# Altium PCB _1PCB (1).PcbDoc
Units mil, origin at the board's own origin, x right, y up, seen from the top; angles counter-clockwise.
Board outline 3580 x 1380 mil, 2 copper layers (Top Layer, Bottom Layer); 31 components, 20 nets, 79 pads, 0 vias.
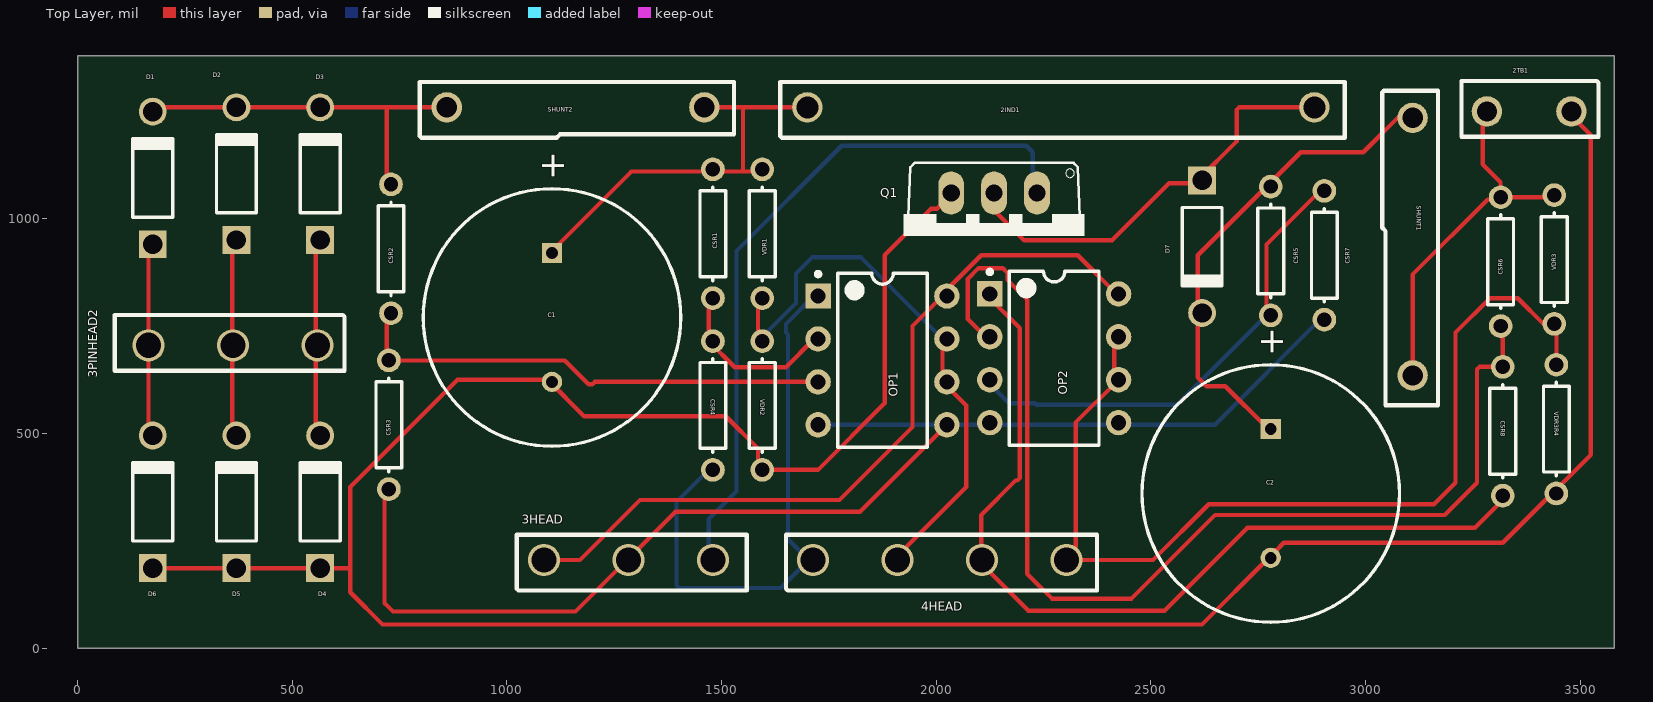
[diagram p0: Top Layer view]
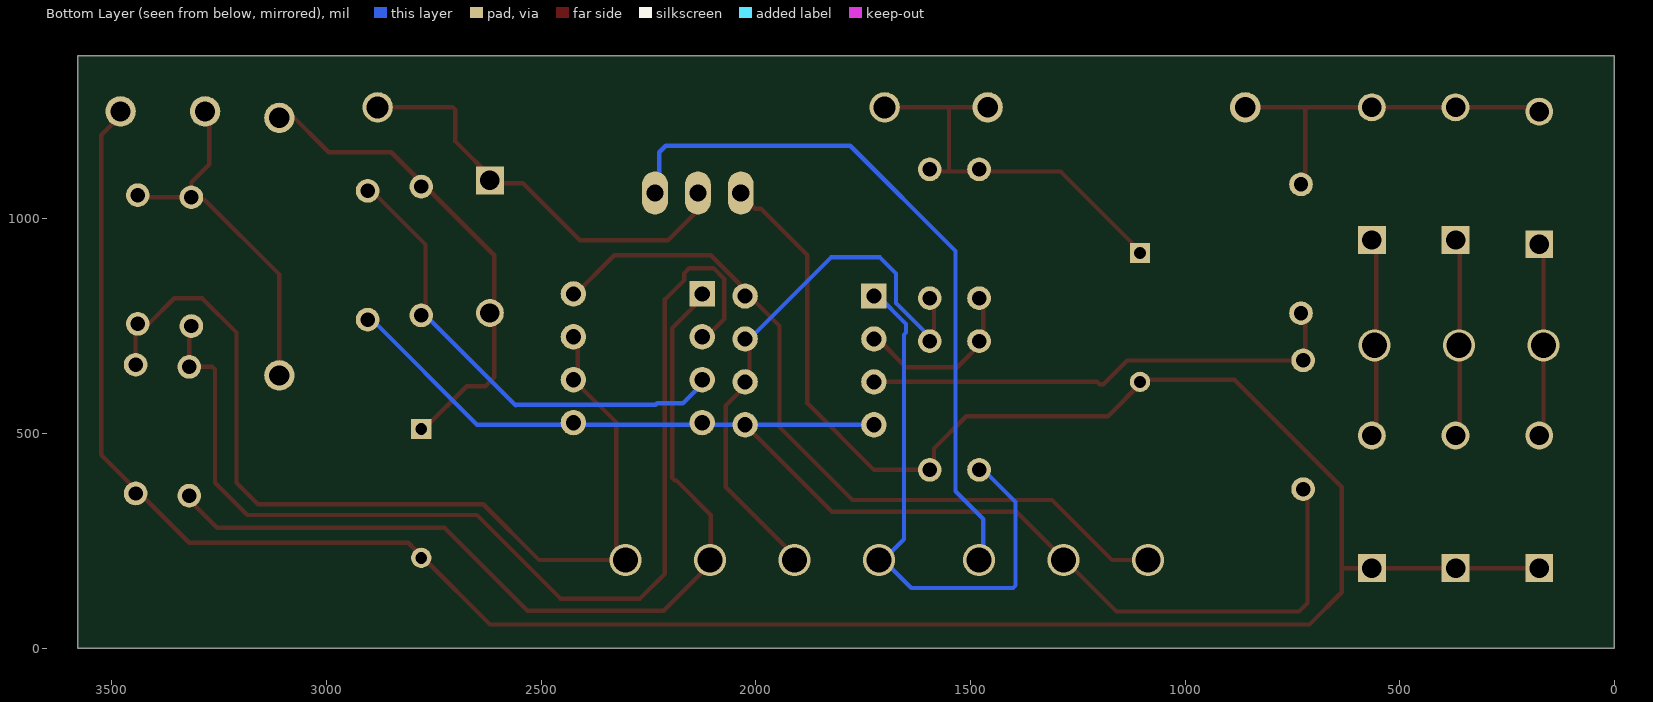
[diagram p1: Bottom Layer view, seen from below]

## Layer stack, top to bottom
Top Solder: solder mask 0.4, Solder Resist, Dk 3.5
Top Layer: signal copper 1.4
Dielectric 1: dielectric 12.6, FR-4, Dk 4.8
Bottom Layer: signal copper 1.4
Bottom Solder: solder mask 0.4, Solder Resist, Dk 3.5

## Board outline
0,0 3580,0 3580,1380 0,1380

## Design rules (kind name [scope] priority, off if disabled: settings)
AssemblyTestPointUsage [All] p1: valid=2
BoardOutlineClearance [All] p1: gap=10 ignorepadtopadclearanceinfootprint=FALSE
Clearance [All] p1: gap=7 ignorepadtopadclearanceinfootprint=FALSE except(0: Arc-Hole Track-Hole SMDPad-Hole THPad-Hole Via-Hole Fill-Hole Poly-Hole Region-Hole Text-Hole)
ComponentClearance [All] p1: gap=0 collisioncheckmode=3 verticalgap=0 showdistances=FALSE
FabricationTestPointUsage [All] p1: valid=2 allowmultiple=FALSE
FabricationTestPointUsage TestPointUsage [All] p2: valid=0 allowmultiple=FALSE
FabricationTestpoint Testpoint [All] p2: side=3 testpointundercomponent=TRUE minsize=40 maxsize=100 preferedsize=60 minholesize=0 maxholesize=40 preferedholesize=32 testpointgrid=1 allowsidetop=TRUE allowsidebottom=TRUE usegrid=TRUE gridtolerance=0.01
Height [All] p1: minheight=0 maxheight=2000 prefheight=500
HoleSize [All] p1: absolutevalues=TRUE maxlimit=250 minlimit=15 maxpercent=80.000 minpercent=20.000
MinimumAnnularRing MinimumAnnularRing_Vias [IsVia] p1: minimumring=5
MinimumAnnularRing [All] p2: minimumring=7
MinimumSolderMaskSliver [All] p1: minsoldermaskwidth=5
PolygonConnect [All] p1: connectstyle=Relief reliefconductorwidth=10 reliefentries=4 polygonreliefangle="90 Angle" airgapwidth=10
RoomDefinition _1PCB_Shematic [InComponentClass('_1PCB_Shematic')] p1: confinementstyle=ConfineIn formatcopy=TRUE lockcomponents=FALSE outline 28.15,5 3583.15,5 3583.15,1360 28.15,1360
RoutingVias [All] p1: holewidth=25 width=50 viastyle="Through Hole" minholewidth=15 minwidth=50 maxholewidth=25 maxwidth=50
SilkToSilkClearance [All] p1: silktosilkclearance=0
SilkToSolderMaskClearance [All] p1: minsilkscreentomaskgap=5 clearancetoexposedcopper=FALSE
SilkToSolderMaskClearance SilkToCopperClearance [All] p2: minsilkscreentomaskgap=10 clearancetoexposedcopper=TRUE
SilkToSolderMaskClearance SilkscreenOverComponentPads [IsPad] p3: minsilkscreentomaskgap=10 clearancetoexposedcopper=TRUE
SolderMaskExpansion [All] p1: expansion=4
Width [All] p1: maxlimit=500 minlimit=10 preferedwidth=10 minimp=50.000000 maximp=50.000000 favimp=50.000000
22 further rules are at their usual default settings.

## Classes and differential pairs
component class _1PCB_Shematic: 2IND1 2TB1 3PINHEAD2 C1 C2 CSR1 CSR2 CSR3 CSR4 D1 D2 D3 D4 D5 D6 D7 OP1 OP2 Q1 VDR1 VDR2 VDR3 VDR3R4

## Components (designator, comment, footprint, x,y, rotation, side; value= is the part's Value field where it differs from the comment)
2IND1 "291 INDUCTOR" "3 CM INDUCTOR" 1700,1259.53 r0 top
2TB1 "2PINTERMINAL" "2 PIN TERMINAL BLOCK" 3480,1250 r180 top
3HEAD "3 PIN HEADER" "3 PIN HEADER" 1086.3,205 r0 top
3PINHEAD2 "3 PIN HEADER" "3 PIN HEADER" 558.7,705 r180 top
4HEAD "4 PIN HEADER" "4 PIN HEADER" 1713.15,205 r0 top
C1 "Cap Pol1" RB7.6-15 1105,770 r90 top value=100pF
C2 "Cap Pol1" RB7.6-15 2779.53,360 r90 top value=100pF
CSR1 "CSR_R1" AXIAL-0.3 1480,965 r90 top value=1k
CSR2 "CSR_R1" AXIAL-0.3 730,930 r90 top value=1k
CSR3 "CSR_R2" AXIAL-0.3 725,520 r270 top value=100k
CSR4 "CSR_R2" AXIAL-0.3 1480,565 r270 top value=100k
CSR5 "CSR_R1" AXIAL-0.3 2779.53,925 r90 top value=1k
CSR6 "CSR_R1" AXIAL-0.3 3315,900 r90 top value=1k
CSR7 "CSR_R2" AXIAL-0.3 2904.53,915 r270 top value=100k
CSR8 "CSR_R2" AXIAL-0.3 3320,505 r270 top value=100k
D1 "1N5817-T" DIOD-DO-41-P-2 175,1095 r90 top
D2 "1N5817-T" DIOD-DO-41-P-2 370,1105 r90 top
D3 "1N5817-T" DIOD-DO-41-P-2 565,1105 r90 top
D4 "1N5817-T" DIOD-DO-41-P-2 565,340.47 r90 top
D5 "1N5817-T" DIOD-DO-41-P-2 370,340.47 r90 top
D6 "1N5817-T" DIOD-DO-41-P-2 175,340.47 r90 top
D7 "1N5817-T" DIOD-DO-41-P-2 2619.53,935 r270 top
OP1 "LM358AN" N08E 1875,670 r0 top
OP2 "LM358AN" N08E 2275,675 r0 top
Q1 "IRFZ48N" TO220BV_IRFZ48N(Primary) 2135,960 r180 top
SHUNT1 "SH. RESISTOR" SHUNT15.24 3110,1235 r270 top
SHUNT2 "SH. RESISTOR" SHUNT15.24 860,1259.53 r0 top
VDR1 "V_DIVA1" AXIAL-0.3 1595,965 r270 top value=200k
VDR2 "V_DIVB2" AXIAL-0.3 1595,565 r270 top value=100k
VDR3 "V_DIVA2" AXIAL-0.3 3440,905 r270 top value=200k
VDR3R4 "V_DIVB2" AXIAL-0.3 3445,510 r270 top value=100k

## Footprints (in the part's own frame and the unit in brackets; to place one, negate y for a bottom-side part, rotate by r counter-clockwise, add the part's x,y. Pads: shape width x height; smd on the part's side, far side on the other; paste and mask are expansions set on the pad)
"2 PIN TERMINAL BLOCK" [mm] "2 PIN TERMINAL BLOCK"
  round 1.8 hole 1.2: 1(0,0) 2(5,0)
  silkscreen extent -1.6,-1.8 6.5,1.5
"3 CM INDUCTOR" [mm] "3 CM INDUCTOR"
  round 1.8 hole 1.3: 1(0,0) 2(30,0)
  silkscreen extent -1.6,-1.8 31.8,1.5
"3 PIN HEADER" [mm] "3 PIN HEADER"
  round 1.9 hole 1.5: 1(0,0) 2(5,0) 3(10,0)
  silkscreen extent -1.6,-1.8 12,1.5
"4 PIN HEADER" [mm] "4 PIN HEADER"
  round 1.9 hole 1.5: 1(0,0) 2(5,0) 3(10,0) 4(15,0)
  silkscreen extent -1.6,-1.8 16.8,1.5
AXIAL-0.3 [mm] "Axial Device, Thru-Hole; 2 Leads; 0.3 in Pin Spacing"
  round 1.4 hole 0.85: 1(-3.81,0) 2(3.81,0)
  silkscreen extent -2.77,-0.76 2.77,0.76
DIOD-DO-41-P-2 [mm] "THD, 2-Leads, Body 4.635x2.36mm, Pin Spacing 7.85mm"
  rect 1.65x1.65 hole 1.15: 1(-3.925,0)
  round 1.65 hole 1.15: 2(3.925,0)
  silkscreen extent -2.32,-1.18 2.32,1.18, body extent -4.36,-1.18 4.36,1.18, height 2.35
N08E [mm] "DIP, 8-Pin, Row Spacing 7.62 mm, Pitch 2.54 mm"
  rect 1.5x1.5 hole 0.9: 1(-3.81,3.81)
  round 1.5 hole 0.9: 2(-3.81,1.27) 3(-3.81,-1.27) 4(-3.81,-3.81) 5(3.81,-3.81) 6(3.81,-1.27) 7(3.81,1.27) 8(3.81,3.81)
  silkscreen extent -3.93,-5.15 2.65,5.23, body extent -3.6,-5.15 3.6,5.15, height 5.33
RB7.6-15 [mm] "Polarized Capacitor (Radial); 2 Leads"
  rect 1.2x1.2 hole 0.7: 1(3.81,0)
  round 1.2 hole 0.7: 2(-3.81,0)
  silkscreen extent -7.62,-7.62 7.62,7.62
SHUNT15.24 [mm] "SHUNT RESISTER 15.24"
  round 1.8 hole 1.2: 1(0,0) 2(15.24,0)
  silkscreen extent -1.6,-1.8 17,1.5
TO220BV_IRFZ48N(Primary) [mil]
  oval 60x100 hole 40: D(0,-100) G(-100,-100) S(100,-100)
  silkscreen extent -210,-170 210,0

## Part data
2IND1: library part 2IND?
2TB1: library part 2TB?
3HEAD 3PINHEAD2: library part 3HEAD?
4HEAD: library part 4HEAD?
C1 C2: "Polarized Capacitor (Radial)", LatestRevisionDate=17-Jul-2002, LatestRevisionNote="Re-released for DXP Platform.", PackageDescription="Polarized Capacitor (Radial); 2 Leads", PackageReference=RB7.6-15, Published=8-Jun-2000, Publisher="Altium Limited"
CSR1 CSR2 CSR3 CSR4 CSR5 CSR6 CSR7 CSR8 VDR1 VDR2 VDR3 VDR3R4: library part Res1, "Resistor", LatestRevisionDate=17-Jul-2002, LatestRevisionNote="Re-released for DXP Platform.", PackageDescription="Axial Device, Thru-Hole; 2 Leads; 0.3 in Pin Spacing", PackageReference=AXIAL-0.3, Published=8-Jun-2000, Publisher="Altium Limited"
D1 D2 D3 D4 D5 D6 D7: library part CMP-2000-05521-1, "Schottky Barrier Rectifier, 1 A, 20 V, -65 to 125 degC, 2-Pin DO-41, RoHS, Tape and Reel", If - Forward Current=1A, Ifsm - Forward Surge Current=25A, Ir - Reverse Current=1000uA, Manufacturer=DiodesIncorporated, Maximum Operating Temperature=+125C, Minimum Operating Temperature=-65C, Operating Temperature Range=-65Cto+125C, Package / Case=DO-41, Package Description="2-Pin Through Hole Device, Body 4.635 x 2.36 mm, Pin Spacing 7.85 mm", Package Reference=DO-41-P-2, Vf - Forward Voltage=0.75Vat3A, Vrrm - Repetitive Reverse Voltage=20V, Brand=DiodesIncorporated, Configuration=Single, Datasheet URL=http://www.diodes.com/_files/datasheets/ds23001.pdf, Datasheet Version="Rev. 8-2, 05/2009", Factory Pack Quantity=5000, Height=2.72mm, Length=5.21mm, Manufacturer URL=http://www.diodes.com/, Mounting Style=ThroughHole, Mounting Technology=ThroughHole, Packaging=Reel, Product=SchottkyRectifiers, Product Category=SchottkyDiodes&Rectifiers, RoHS=True, Series=1N58, Technology=Si, Termination Style=ThroughHole, Type=SchottkyDiode, Unit Weight=0.010582oz, Width=2.72mm
OP1 OP2: library part CMP-0055-00164-2, "Low Power Dual Operational Amplifier, 8-pin MDIP", Manufacturer="National Semiconductor", PackageTopMarking=NSUZXYTTE#*LM*358AN, PowerWise=N, Code_JEDEC=MS-001-BA, ComponentLink1Description="LM358 Datasheet", ComponentLink1URL=http://www.national.com/ds/LM/LM358.pdf, ComponentLink2Description="LM358 Web Page", ComponentLink2URL=http://www.national.com/pf/LM/LM358.html, ComponentLink3Description="N08E Package Page", ComponentLink3URL=http://www.national.com/packaging/folders/n08e.html, CompType=Amplifiers, DatasheetVersion=Oct-2005, PackageDescription="MDIP, .365 x .250 x .130in, 8 Lead, .100in Pitch", PackageReference=N08E, PackageVersion="revG, May-2006", PinCount=8, RevisionNote="Component URLs added", RoHS=N
Q1: "55V Single N-Channel HEXFET Power MOSFET in a TO-220AB package", Package=None, Availability=Unavailable, MF="International Rectifier", MP=IRFZ48N, Price=None, SnapEDA_Link=https://www.snapeda.com/parts/IRFZ48N/International%20Rectifier/view-part/?ref=snap
SHUNT1 SHUNT2: library part SHUNTR?

## Nets (pads, with @x,y where several pads share a name; then routed paths per layer and width w, separated by ;. In a path a pad name is that pad's centre, name@x,y a point inside that pad or via, vN(x,y) a via of type N, cw(c..) or ccw(c..) an arc to the next point about the centre after c; other vN are vias at no path point)
"ARD 5V": 3HEAD.1 OP1.8 OP2.8 | length 1825.7
  Top Layer w10: 3HEAD.1@1076.3,205 1170,205 1310,345 1775,345 1945,515 1945,750 OP1.8@2015,820 ; OP1.8@2015,830 2019.93,830 2104.93,915 2330,915 OP2.8@2425,820 ; OP2.8@2420,835 OP2.8@2430,835
"ARD GND": 3HEAD.2 CSR3.2 CSR7.2 OP1.4 OP1.5 OP2.4 OP2.5 | length 3043.3
  Top Layer w10: CSR3.2@715,370 715,104.53 734.53,85 1160,85 1392.5,317.5 1822.5,317.5 2005,500 OP1.5@2005,520
  Bottom Layer w10: 3HEAD.2@1273.15,205 3HEAD.2@1280,205 ; OP1.4@1715,520 2125,520 2415,520 2649.53,520 CSR7.2@2894.53,765
"CURRENT 1": 4HEAD.1 CSR4.2 OP1.1 | length 1301.6
  Bottom Layer w10: CSR4.2@1470,415 1395,340 1395,145.86 1400.86,140 1638.15,140 1703.15,205 1655,253.15 1655,730 1650,735 1650,755 OP1.1@1715,820
"CURRENT 2": 4HEAD.3 CSR8.2 OP2.1 | length 2085.1
  Top Layer w10: OP2.1@2115,825 2195,745 2195,395.86 2189.14,390 2185,390 2105,310 2105,213.15 2096.85,205 2214.85,87 2532,87 2725,280 3255,280 3320,345 CSR8.2
Net2IND1_1: 2IND1.1 C1.1 CSR1.2 SHUNT2.2 VDR1.1 | length 948.2
  Top Layer w10: C1.1@1105,925 1290,1110 1470,1110 1550,1110 ; SHUNT2.2@1450,1259.53 1550,1259.53 ; VDR1.1@1585,1115 1580,1110 1550,1110 ; 2IND1.1@1690,1259.53 1550,1259.53 ; 1550,1110 1550,1259.53
Net2IND1_2: 2IND1.2 D7.1 Q1.D | length 980.6
  Top Layer w10: Q1.D@2125,1060 2125,1030 2205,950 2410,950 2542.5,1082.5 2602.5,1082.5 2609.53,1089.53 2700,1180 2700,1253.67 2705.86,1259.53 2IND1.2@2871.1,1259.53
Net2TB1_1: 2TB1.1 C1.2 C2.2 D4.1 D5.1 D6.1 Q1.S VDR2.2 VDR3R4.2 | length 6695.3
  Top Layer w10: D6.1@165,185.94 D6.1 D5.1 D4.1 629.14,185.94 ; Q1.S@2025,1060 2025,1046.28 2001.9,1023.18 1988.18,1023.18 1880,915 1880,570 1725,415 VDR2.2 1585,415 1585,465 1510,540 1180,540 1095,625 885,625 635,375 635,130 710,55 2619.53,55 C2.2@2772.64,208.11 ; C2.2@2772.87,227.87 2792.64,227.87 2809.76,245 3320,245 3525,450 3525,1195 2TB1.1@3470,1250
Net2TB1_2: 2TB1.2 CSR6.2 SHUNT1.2 VDR3.1 | length 849
  Top Layer w10: SHUNT1.2@3110,655 3110,870 3284.91,1044.91 3314.91,1044.91 CSR6.2@3320,1050 ; 2TB1.2@3273.15,1250 3273.15,1126.85 3314.91,1085.09 3314.91,1055.09 CSR6.2@3320,1050 ; VDR3.1@3450,1050 CSR6.2@3320,1050
NetC2_1: C2.1 CSR5.2 D7.2 SHUNT1.1 | length 1148.8
  Top Layer w10: C2.1@2784.76,515.24 2768.46,515.24 2673.7,610 2630,610 2609.53,630.47 2609.53,915 2849.53,1155 2995,1155 3087.87,1247.87 3102.87,1247.87 SHUNT1.1@3110,1255
NetCSR1_1: CSR1.1 CSR4.1 OP1.2 | length 398
  Top Layer w10: CSR1.1@1470,815 1470,715 1530.86,654.14 1650,654.14 1715,719.14 OP1.2@1715,720
NetCSR2_1: CSR2.1 CSR3.1 OP1.3 | length 1139.7
  Top Layer w10: CSR3.1@715,655 CSR3.1@720,660 ; CSR2.1@720,780 720,675 715,670 1135,670 1190.86,614.14 1199.14,614.14 1205,620 OP1.3@1710,620
NetCSR5_1: CSR5.1 CSR7.1 OP2.3 | length 1108.1
  Top Layer w10: CSR5.1@2769.53,775 2769.53,940 CSR7.1@2894.53,1065
  Bottom Layer w10: OP2.3@2115,625 2170,570 2230,570 2233.47,566.53 2558,566.53 2559.53,565 CSR5.1@2769.53,775
NetCSR6_1: CSR6.1 CSR8.1 OP2.2 | length 2586.9
  Top Layer w10: OP2.2@2115,725 2073.47,766.53 2073.47,859.5 2098.97,885 2155,885 2166.53,873.47 2166.53,857.61 2212,812.14 2212,173 2270,115 2455,115 2650,310 3185,310 3260,385 3260,649.14 3265.86,655 CSR8.1 ; CSR6.1@3320,750 3320,660 CSR8.1@3325,655
"PHASE 1": 3PINHEAD2.3 D1.1 D6.2 | length 455.5
  Top Layer w10: D6.2@165,495 165,695 D1.1@165,950.47
"PHASE 2": 3PINHEAD2.2 D2.1 D5.2 | length 455.5
  Top Layer w10: D5.2@360,495 360,695 D2.1@360,950.47
"PHASE 3": 3PINHEAD2.1 D3.1 D4.2 | length 455.5
  Top Layer w10: D4.2@555,495 555,695 D3.1@555,950.47
PWM: 3HEAD.3 Q1.G | length 1639.6
  Bottom Layer w10: 3HEAD.3@1470,205 1470,300 1535,365 1535,925 1780,1170 2210,1170 2225,1155 Q1.G@2225,1060
Vdc: CSR2.2 D1.2 D2.2 D3.2 SHUNT2.1 | length 864.5
  Top Layer w10: D1.2@165,1259.53 360,1259.53 555,1259.53 720,1259.53 ; CSR2.2@720,1080 720,1259.53 ; SHUNT2.1@850,1259.53 735,1259.53 720,1259.53
"VOLTAGE 1": 4HEAD.2 OP1.6 OP1.7 VDR1.2 VDR2.1 | length 1344
  Top Layer w10: VDR2.1@1585,715 VDR1.2@1585,815 ; 4HEAD.2@1900,205 2070,375 2070,565 2025,610 OP1.6 ; OP1.6@2015,610 OP1.7@2015,720
  Bottom Layer w10: VDR2.1@1585,715 1673.47,803.47 1673.47,872.61 1710.86,910 1825,910 OP1.7@2015,720
"VOLTAGE 2": 4HEAD.4 OP2.6 OP2.7 VDR3.2 VDR3R4.1 | length 2298.2
  Top Layer w10: OP2.6@2415,625 OP2.7@2415,725 ; OP2.6@2420,620 2325,525 2325,236.3 2293.7,205 2505,205 2635,335 3160,335 3210,385 3210,735 3290,815 3355,815 3415,755 3445,755 3445,665 VDR3R4.1@3450,660

## Text inside footprints (layer, text, board x,y; h text height)
C1: Top Overlay "+" at 1134.01,1090.15 h59.06 r90
C2: Top Overlay "+" at 2808.54,680.15 h59.06 r90